# EAGLE board MoodSpark_V1p0 (EAGLE 6.4)
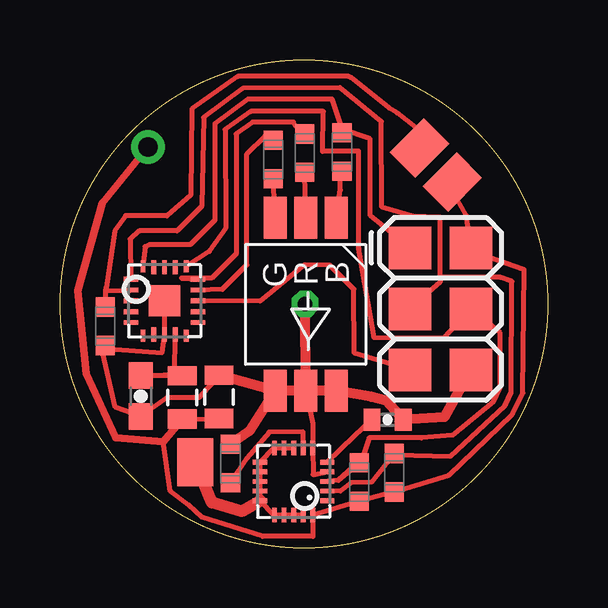
[diagram p0: board, top side]
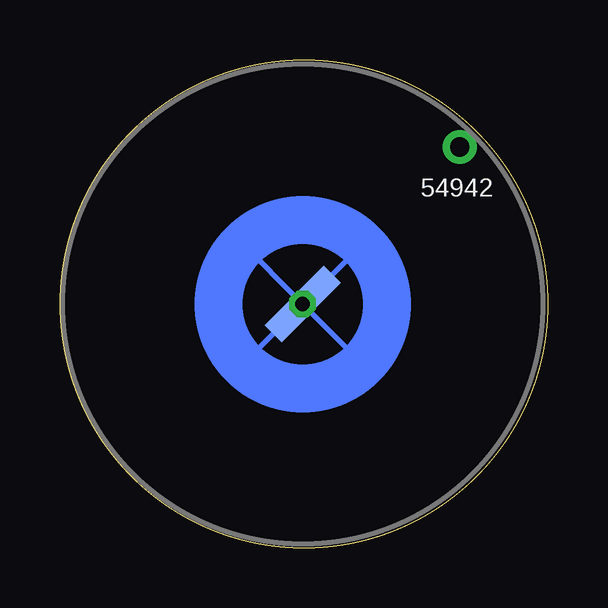
[diagram p1: board, bottom side, seen from below]

Size 20.32 x 20.32 mm. Coordinates in mm from the lower left corner, seen from the top.
Outline: circle at 10.16,10.16 radius 10.16
Copper layers (1*16): Top 0.035mm / dielectric 1.5mm / Bottom 0.035mm
Design rules "SparkFun": minimum track width 8mil, minimum drill 20mil, track to track 8mil, track to pad 8mil, pad to pad 8mil, via to via 8mil, smd to smd 8mil, copper to edge 10mil, drill to drill 8mil, minimum pad ring 12mil, minimum via ring 10mil, stop-mask expansion 4mil, vias tented up to drill 25mil, thermal gap 10mil
Net classes: 0 default: width 0.305 mm, clearance 0.305 mm; 1 power: width 0.406 mm, clearance 0.406 mm; 2 gnd: width 0.406 mm, clearance 0.406 mm

## Footprints (pad centres in the part's own frame; a part is rotated, then mirrored left to right if it is on the bottom)
BATTERY_20_NEGONLY = drill 0.8: 1 -9.25,0 | smd 3.5 x 1: 2 0,0
0603-CAP = smd 1.1 x 1: 1 -0.85,0; 2 0.85,0
0805 = smd 0.8 x 1.2: 1 -0.9,0; 2 0.9,0
0402-CAP = smd 0.7 x 0.9: 1 -0.65,0; 2 0.65,0
PAD-1.5X4.5 = smd 1.5 x 2: P$1 0,0
0603_TANJ = smd 0.8 x 0.8: P$1 -0.8,0; P$2 0.8,0
SMLW56_SRGB2 = smd 1.75 x 0.96: P$1 -1.1,3.77; P$2 -1.1,2.5; P$3 -1.1,1.23; P$4 6.1,1.23; P$5 6.1,2.5; P$6 6.1,3.77
QFN-20-0.4MM = smd 0.6 x 0.2: 1 -1.4,0.8; 2 -1.4,0.4; 3 -1.4,0; 4 -1.4,-0.4; 5 -1.4,-0.8; 11 1.4,-0.8; 12 1.4,-0.4; 13 1.4,0; 14 1.4,0.4; 15 1.4,0.8 | smd 0.2 x 0.6: 6 -0.8,-1.4; 7 -0.4,-1.4; 8 0,-1.4; 9 0.4,-1.4; 10 0.8,-1.4; 16 0.8,1.4; 17 0.4,1.4; 18 0,1.4; 19 -0.4,1.4; 20 -0.8,1.4
ATTINY24_VQFN = smd 0.6 x 0.2: 1 -1.395,0.905; 2 -1.395,0.455; 3 -1.395,0.005; 4 -1.395,-0.445; 5 -1.395,-0.895; 11 1.405,-0.895; 12 1.405,-0.445; 13 1.405,0.005; 14 1.405,0.455; 15 1.405,0.905 | smd 0.2 x 0.5: 6 -0.895,-1.445; 10 0.905,-1.445; 16 0.905,1.455; 20 -0.895,1.455 | smd 0.2 x 0.6: 7 -0.445,-1.395; 8 0.005,-1.395; 9 0.455,-1.395; 17 0.455,1.405; 18 0.005,1.405; 19 -0.445,1.405 | smd 1.3 x 1.3: P$1 0.005,0.005
2X3 = smd 1.778 x 1.778: 1 0,0; 2 0,2.54; 3 2.54,0; 4 2.54,2.54; 5 5.08,0; 6 5.08,2.54

## Placement (x,y rotation side)
BAT2  CR2032  [BATTERY_20_NEGONLY]  10.2,10.15 225 bottom
CF  0.1  [0603-CAP]  3.37,6.32 270 top
CP  22  [0805]  6.63,6.28 90 top
CREG  0.1  [0402-CAP]  13.65,5.33 0 top
JP1  M01SMD-4.5X1.5  [PAD-1.5X4.5]  5.64,3.56 0 top
R1  1k  [0603_TANJ]  11.75,16.49 90 top
R2  1k  [0603_TANJ]  8.89,16.18 90 top
R3  1k  [0603_TANJ]  10.19,16.44 90 top
R4  75k  [0603_TANJ]  7.1,3.51 90 top
R5  10k  [0603_TANJ]  13.93,3.12 90 top
R6  10k  [0603_TANJ]  12.46,2.74 90 top
R7  0  [0805]  5.09,6.26 270 top
RU  30k  [0603_TANJ]  1.89,9.23 90 top
THERM_POS  M01SMD-4.5X1.5  [PAD-1.5X4.5]  16.34,15.23 315 top
THERM_SIG  M01SMD-4.5X1.5  [PAD-1.5X4.5]  14.97,16.65 315 top
U$1  SMLW56  [SMLW56_SRGB2]  7.74,12.64 270 top
U$2  MPR121QFN20  [QFN-20-0.4MM]  9.73,2.76 180 top
U$3  ATTINY24_VQFN  [ATTINY24_VQFN]  4.35,10.28 0 top
U$4  AVR_SPI_PRG_6_SMT  [2X3]  14.58,12.49 270 top

## Library data of the parts
BAT2 U$1 U$3 U$4 = EricBoyd
CF CP CREG JP1 R7 THERM_POS THERM_SIG U$2 = SparkFun
R1-R6 RU = tanjent

## Nets
GND [gnd]: BAT2.2 CF.2 CP.2 CREG.2 R4.P$2 RU.P$1 U$1.P$4 U$1.P$5 U$1.P$6 U$2.4 U$2.6 U$3.8 U$3.P$1 U$4.6
MISO: R1.P$2 U$3.20 U$4.1
MOSI: R6.P$2 U$2.3 U$3.16 U$4.4
N$1: R1.P$1 U$1.P$1
N$2: R2.P$1 U$1.P$3
N$3: R3.P$1 U$1.P$2
N$4: JP1.P$1 U$2.8 U$2.9 U$2.10 U$2.11 U$2.12 U$2.13 U$2.14 U$2.15 U$2.16 U$2.17 U$2.18 U$2.19
N$5: R2.P$2 U$3.14
N$6: R4.P$1 U$2.7
N$7: R3.P$2 U$3.15
N$8: CREG.1 U$2.5
N$9 [power]: CF.1 R7.1 U$3.9
N$10: RU.P$2 THERM_SIG.P$1 U$3.2
RESET: U$3.13 U$4.5
SCK: R5.P$2 U$2.2 U$3.1 U$4.3
VCC [power]: BAT2.1 CP.1 R5.P$1 R6.P$1 R7.2 THERM_POS.P$1 U$2.20 U$4.2

## Tracks (layer width: path | path; a pad name or v marks a point on that pad's centre or on a via)
GND  (via drill 0.6)
  Top 0.203: U$3.P$1 U$3.8 4.26,8.12 1.74,8.31 | U$2.4 10.55,3.04 U$2.6 10.53,5.17 U$1.P$5 | CP.2 5.79,6.25 4.45,6.24 CF.2 2.31,5.85 1.74,8.31 | 1.74,8.31 RU.P$1
  Top 0.406: U$1.P$4 CP.2 | U$1.P$5 U$1.P$4 | U$1.P$5 U$1.P$6 12.97,6.28 13.6,6.13 CREG.2 16.02,5.44 U$4.6 | U$1.P$4 7.91,4.87 R4.P$2 | U$1.P$5 v10.21,10.16
  Bottom 0.203: v10.21,10.16 BAT2.2
MISO
  Top 0.203: 11.76,17.43 R1.P$2 | 11.76,17.43 11.34,18.69 7.82,18.69 6.45,17.67 6.45,13.65 5.44,12.63 3.73,12.63 3.54,12.54 U$3.20 | 11.76,17.43 12.92,17.03 12.93,13.84 U$4.1
MOSI
  Top 0.203: U$3.16 6.22,12.35 6.9,13.3 6.89,17.43 7.95,18.18 10.97,18.18 10.95,16.51 12.44,16.53 12.45,12.46 13.09,8.75 15.97,8.73 U$4.4 18.34,8.95 18.34,6.69 18.06,6.1 16.34,4.69 15.06,4.57 12.88,4.57 12.6,3.71 11.6,2.8 | 11.6,2.8 U$2.3 | 11.6,2.8 R6.P$2
N$1
  Top 0.203: R1.P$1 11.66,15.99 11.68,14.91 U$1.P$1
N$2
  Top 0.203: U$1.P$3 R2.P$1
N$3
  Top 0.203: U$1.P$2 R3.P$1
N$4
  Top 0.203: U$2.19 U$2.18 U$2.17 U$2.16 U$2.15 U$2.14 U$2.13 U$2.12 U$2.11 U$2.10 U$2.9 U$2.8
  Top 0.508: U$2.15 7.57,1.52 6.33,1.89 JP1.P$1
N$5
  Top 0.203: U$3.14 6.77,10.77 7.79,11.78 7.79,16.41 8.55,17.17 8.52,17.07 R2.P$2
N$6
  Top 0.203: U$2.7 10.13,4.83 8.72,4.82 7.79,3.73 R4.P$1
N$7
  Top 0.203: R3.P$2 9.82,17.57 9.72,17.73 8.02,17.73 7.34,17.25 7.34,12.24 6.32,11.23 5.05,11.23 U$3.15
N$8
  Top 0.203: U$2.5 12.24,4.63 CREG.1
N$9
  Top 0.203: U$3.9 4.78,7.23 CF.1 R7.1
N$10
  Top 0.203: 1.89,10.7 U$3.2 | 1.89,10.7 1.92,10.83 2.29,13.21 2.74,13.83 4.47,13.83 5.44,14.68 5.5,18.28 7.42,19.63 12.03,19.63 12.11,19.59 13.71,18.32 14.05,18.12 14.85,17.5 15.21,17.17 THERM_SIG.P$1 | 1.89,10.7 RU.P$2
RESET
  Top 0.203: U$3.13 8.34,10.28 10.19,11.78 11.23,11.77 12.24,10.77 12.27,8.1 U$4.5
SCK
  Top 0.203: U$3.1 2.92,12.85 3.31,13.2 4.88,13.2 5.9,14.22 5.98,17.93 7.61,19.14 11.66,19.17 13.39,17.75 13.41,14.18 14.7,13.81 15.84,13.77 15.84,11.27 | 15.84,11.27 15.84,11.06 U$4.3 | U$2.2 11.69,2.37 12.14,2.71 12.98,2.74 R5.P$2 | 13.89,3.87 13.99,3.87 16.27,3.82 18.55,5.94 18.8,6.48 18.83,11.1 18.35,11.27 15.84,11.27
  Top 0.508: R5.P$2 13.99,3.87
VCC
  Top 0.203: 17.15,12.34 U$4.2 | 17.15,12.34 16.93,13.84 16.56,14.52 THERM_POS.P$1 | 17.15,12.34 19.34,11.58 19.28,6.45 18.85,5.57 16.19,3.02 R5.P$1 R6.P$1 U$2.20 10.54,0.47 8.44,0.47 5.9,1.28 5.37,1.77 4.6,2.36 4.31,4.4 | R7.2 CP.1
  Top 0.305: BAT2.1 1.75,14.34 0.73,10.71 1.1,7.25 2.31,4.58 4.31,4.4 R7.2

## Text on the board
bNames: 54942
200bmp: sensebridge.com | Spark | Mood